# EAGLE board 2017-06-17_07-56-57 (EAGLE 6.4)
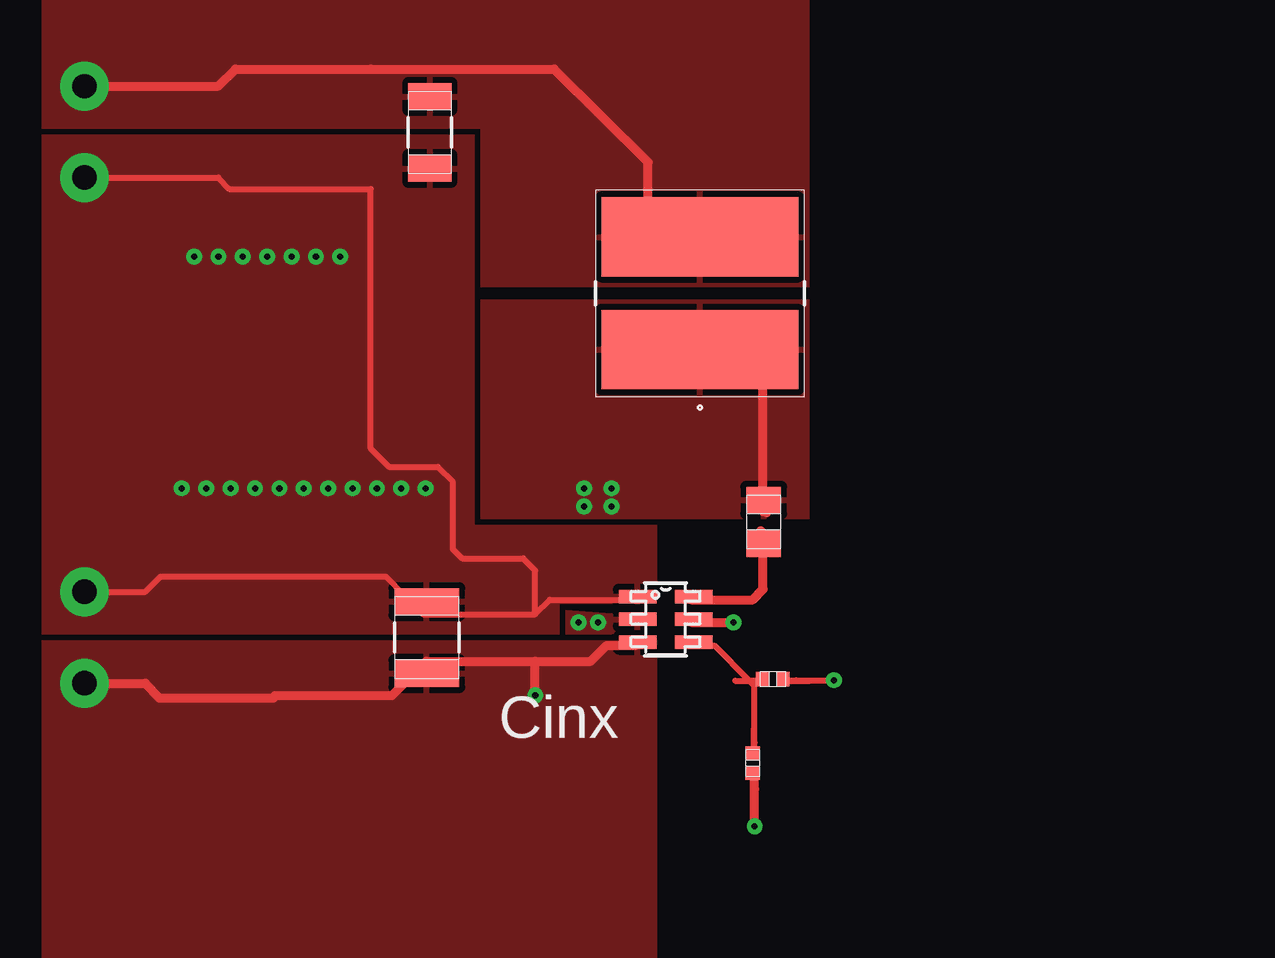
[diagram p0: board, top side]
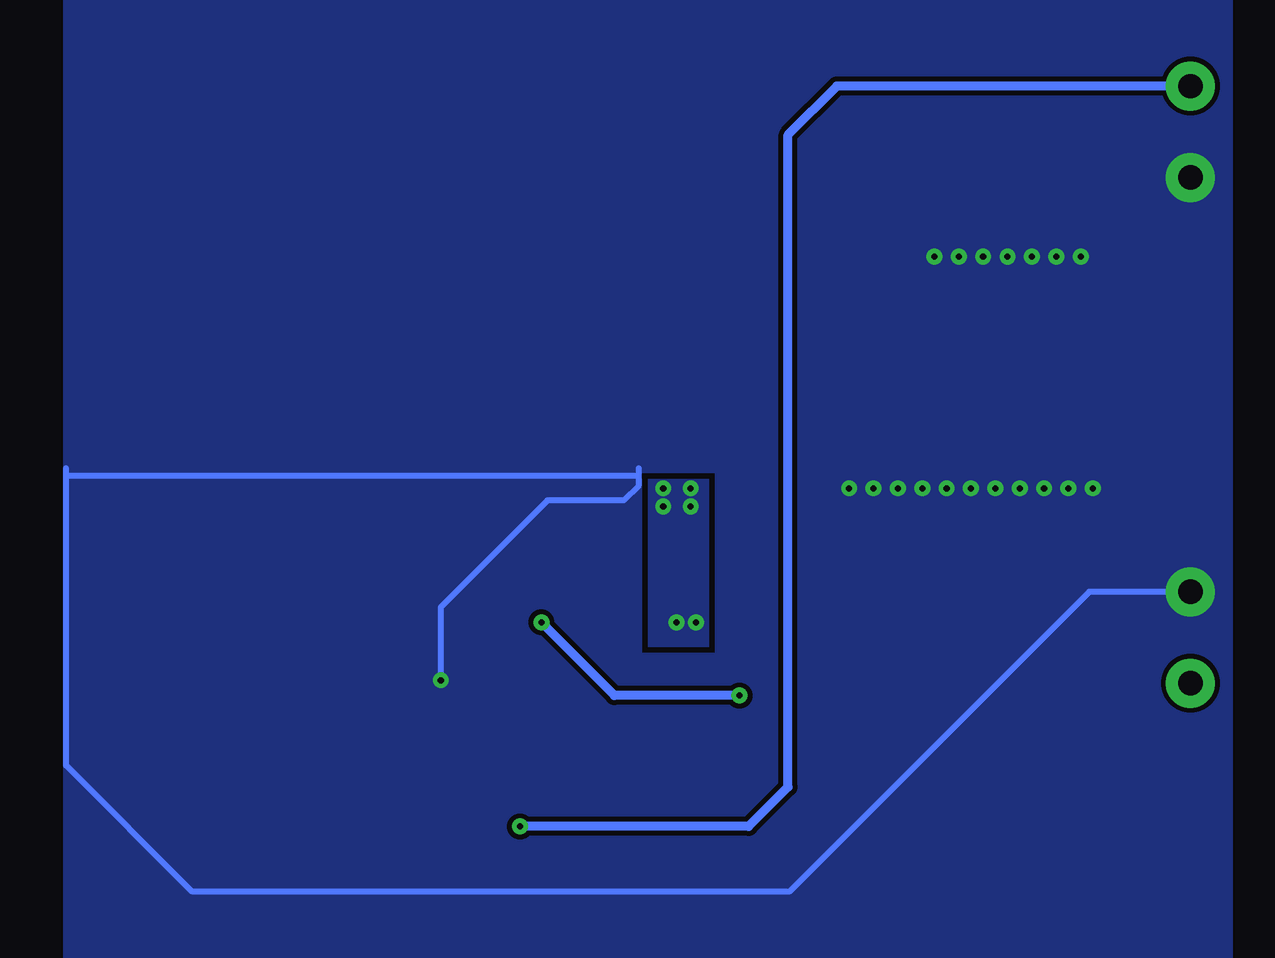
[diagram p1: board, bottom side, seen from below]

No outline drawn. Coordinates in mm, seen from the top.
Copper layers ((1*2)+(15*16)): TOP / INTERNAL1 / layer 15 / BOTTOM

## Footprints (pad centres in the part's own frame; a part is rotated, then mirrored left to right if it is on the bottom)
0805 = smd 1.118 x 1.448: 1 -0.902,0; 2 0.902,0
1210 = smd 1.118 x 2.692: 1 -1.499,0; 2 1.499,0
1206 = smd 1.118 x 1.803: 1 -1.499,0; 2 1.499,0
TP-1502 = drill 0.813 round: 1 0,0
VLP8040 = smd 3.302 x 8.204: 1 -2.349,0; 2 2.349,0
0402 = smd 0.559 x 0.61: 1 -0.419,0; 2 0.419,0
DDC0006A = smd 1.575 x 0.559: 1 -1.168,0.95; 2 -1.168,0; 3 -1.168,-0.95; 4 1.168,-0.95; 5 1.168,0; 6 1.168,0.95

## Placement (x,y rotation side)
Cbst  [0805]  56.52,52.2 270 top
Cin  [1210]  42.47,47.37 90 top
Cout  [1206]  42.6,68.43 270 top
GND  [TP-1502]  28.14,49.25 90 top
GND1  [TP-1502]  28.14,66.55 90 top
L1  [VLP8040]  53.85,61.72 90 top
Rfbb  [0402]  56.9,45.64 0 top
Rfbt  [0402]  56.06,42.14 90 top
U1  [DDC0006A]  52.43,48.13 0 top
VIN  [TP-1502]  28.14,45.42 90 top
VOUT  [TP-1502]  28.14,70.33 90 top

## Library data of the parts
Cbst = ultra-librarian; RefDes: Cbst; Type: 08053C104KAT2A
Cin = ultra-librarian; RefDes: Cin; Type: GRM32ER61E226KE15L
Cout = ultra-librarian; RefDes: Cout; Type: C3216JB1A476M
GND = ultra-librarian; RefDes: GND; Type: TP-1502
GND1 = ultra-librarian; RefDes: GND1; Type: TP-1502
L1 = ultra-librarian; RefDes: L1; Type: VLP8040T-3R3N
Rfbb = ultra-librarian; RefDes: Rfbb; Type: CRCW040210K2FKED
Rfbt = ultra-librarian; RefDes: Rfbt; Type: CRCW040256K2FKED
U1 = ultra-librarian; RefDes: U1; Type: TPS563200DDCR
VIN = ultra-librarian; RefDes: VIN; Type: TP-1502
VOUT = ultra-librarian; RefDes: VOUT; Type: TP-1502

## Nets
0: Cin.2 Cout.2 GND1.1 GND.1 Rfbb.2 U1.1
3: Rfbb.1 Rfbt.2 U1.4
5: Cbst.1 L1.1 U1.2
6: Cout.1 L1.2 Rfbt.1 VOUT.1
8: Cin.1 U1.3 U1.5 VIN.1
9: Cbst.2 U1.6

## Tracks (layer width: path | path; a pad name or v marks a point on that pad's centre or on a via)
0  (via drill 0.25 pad 0.61, 1.02 pad 2.03)
  TOP 0.254: 46.99,48.34 46.99,50.16 46.48,50.67 43.94,50.67 43.56,51.05 43.56,53.85 42.93,54.48 40.89,54.48 40.13,55.24 40.13,66.06 34.24,66.06 33.78,66.55 v28.19,66.55 | 46.99,48.34 47.6,48.95 51.16,48.95 | v28.19,49.28 30.73,49.28 31.37,49.91 40.77,49.91 42.32,48.34 46.99,48.34 | 57.28,45.59 57.86,45.59 v59.44,45.59 | 57.25,45.57 58.45,45.57
  BOTTOM 0.254: v59.44,45.59 59.44,48.64 54.99,53.09 51.82,53.09 51.18,53.72 51.18,54.1 | v28.19,49.28 32.41,49.28 44.91,36.78 69.8,36.78 75.06,42.04 75.06,54.1 | 51.18,54.1 75.06,54.1 | 51.18,54.1 51.18,54.43 | 75.06,54.1 75.06,54.43
  other vias: 37.34,53.59 36.32,53.59 35.31,53.59 33.27,53.59 40.39,53.59 42.42,53.59 32.77,63.25 33.78,63.25 34.8,63.25 35.81,63.25 36.83,63.25 37.85,63.25 38.86,63.25 32.26,53.59 34.29,53.59 38.35,53.59 39.37,53.59 41.4,53.59
  pour TOP: 26.42,47.5 48.01,47.5 48.01,48.77 52.07,48.77 52.07,52.07 44.45,52.07 44.45,68.33 26.42,68.33
  pour BOTTOM (rank 6): 48.01,54.23 75.18,54.23 75.18,85.34 26.42,85.34 26.42,26.42 75.18,26.42 75.18,53.98 51.05,53.98 51.05,46.74 48.01,46.74
3
  TOP 0.254: 56.13,42.42 56.13,43 56.13,45.36 55.91,45.59 | 55.91,45.59 56.52,45.59 | 55.91,45.59 54.46,47.04 53.49,47.04 | 55.32,45.57 56.52,45.57 | 56.11,42.39 56.11,43.59
5  (via drill 0.25 pad 0.61)
  TOP 0.254: 56.46,52.55 56.46,54.1
  TOP 0.381: 56.64,52.58 56.49,52.73 56.49,53.21 56.49,58.06 55.37,59.16 51.69,59.16
  other vias: 49.02,52.83 50.16,52.83 50.16,53.59 49.02,53.59 48.79,48.01 49.61,48.01
  pour TOP (rank 3): 58.42,61.47 44.7,61.47 44.7,52.32 58.42,52.32
  pour TOP (rank 5): 51.94,47.62 50.16,47.5 48.26,47.5 48.26,48.51 50.16,48.39 51.94,48.39
  pour BOTTOM: 48.26,53.98 50.8,53.98 50.8,46.99 48.26,46.99
6  (via drill 0.25 pad 0.61, 1.02 pad 2.03)
  TOP 0.254: 56.11,40.46 56.11,41.66
  TOP 0.381: v28.19,70.36 33.78,70.36 34.49,71.07 40.13,71.07 47.78,71.07 51.69,67.18 51.69,64.26 51.44,64.01 | 56.13,41.53 56.13,41.05 v56.13,39.5
  BOTTOM 0.381: v28.19,70.36 42.93,70.36 44.96,68.33 44.96,41.15 46.61,39.5 v56.13,39.5
  pour TOP (rank 2): 58.42,61.98 44.7,61.98 44.7,68.58 26.42,68.58 26.42,85.34 58.42,85.34
8  (via drill 0.25 pad 0.61, 1.02 pad 2.03)
  TOP 0.381: v46.99,44.96 46.99,46.38 | v28.19,45.47 30.73,45.47 31.32,44.86 36.07,44.86 36.14,44.96 41.02,44.96 42.44,46.38 46.99,46.38 | 46.99,46.38 49.3,46.38 49.96,47.04 51.16,47.04 | v55.24,48.01 | 53.49,48.01 v55.24,48.01
  BOTTOM 0.381: v55.24,48.01 52.2,44.96 v46.99,44.96
  pour TOP (rank 4): 26.42,47.24 52.07,47.24 52.07,30.99 26.42,30.99
9
  TOP 0.254: 56.46,50.27 56.46,51.82
  TOP 0.381: 53.49,48.95 56.06,48.95 56.49,49.38 56.49,51.18 56.49,51.71 56.39,51.82

## Text on the board
ASSYNOTES: Cinx